# EAGLE board PCB v37 (EAGLE 9.7.0)
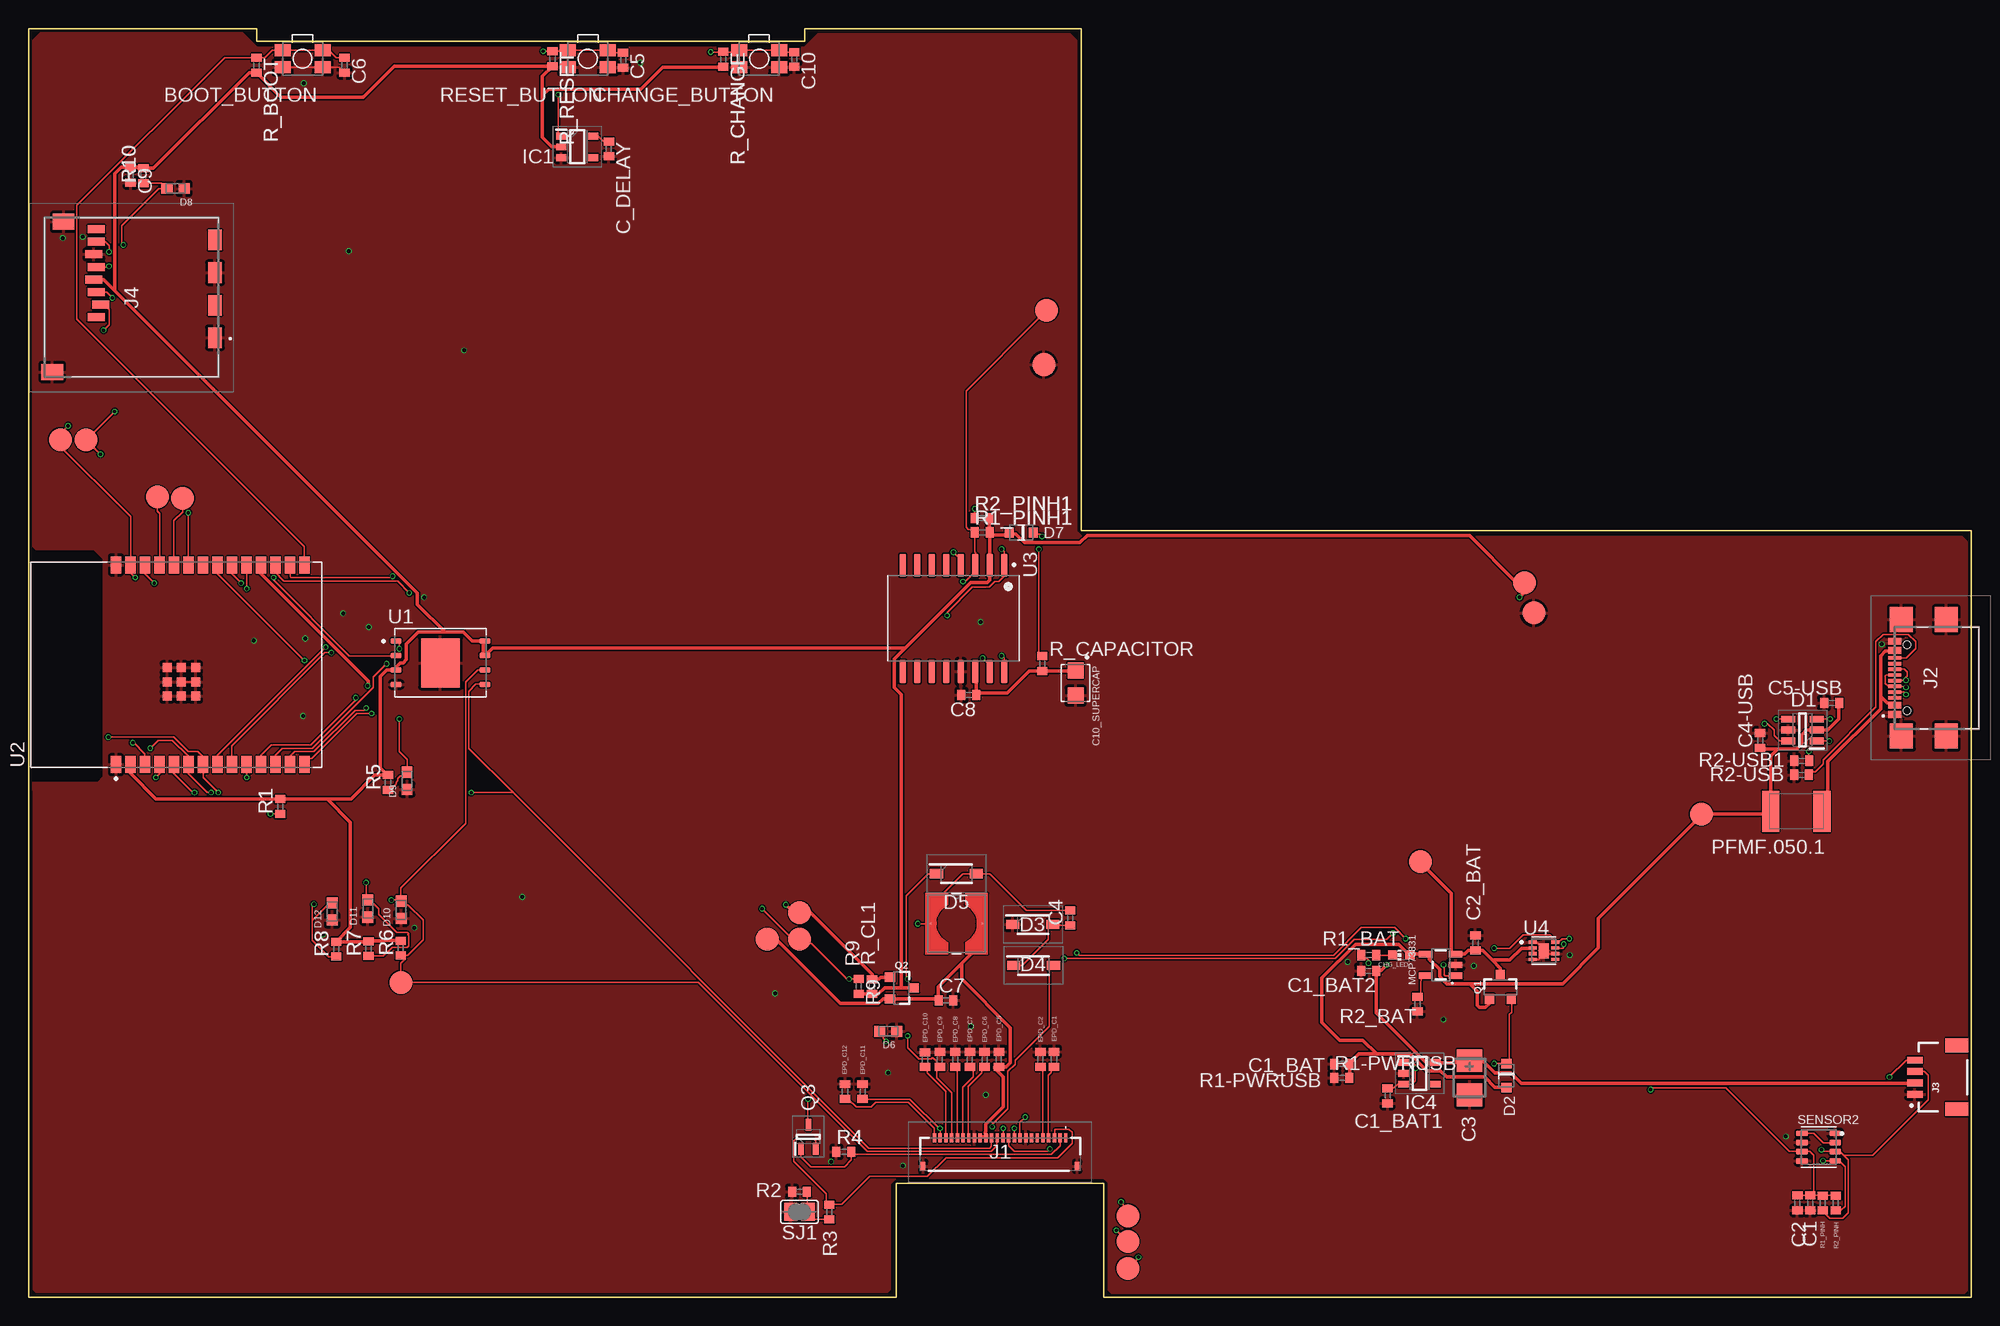
[diagram p0: board, top side]
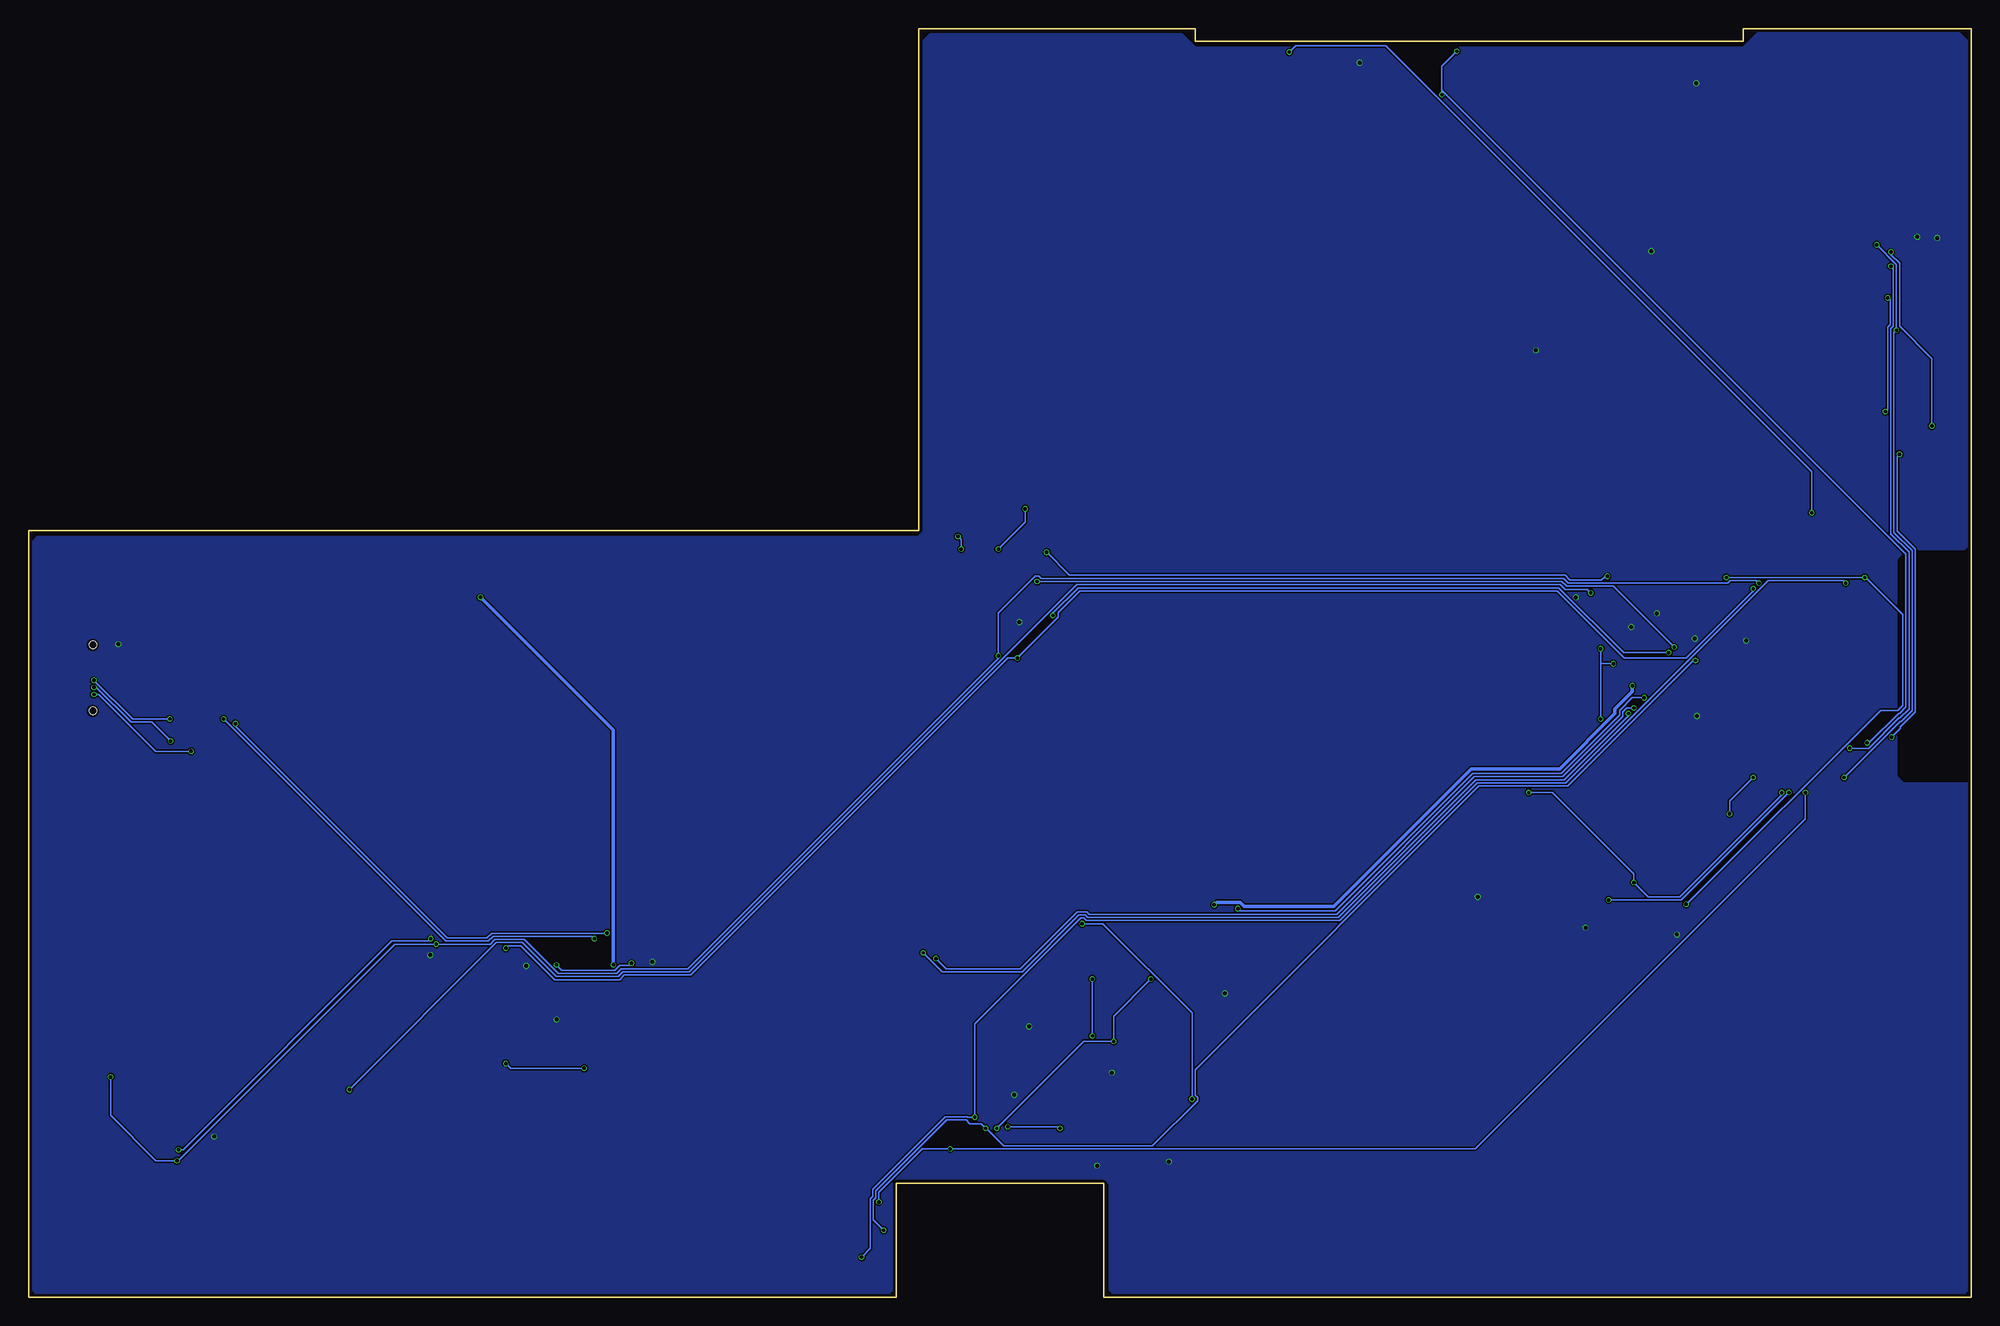
[diagram p1: board, bottom side, seen from below]

Size 170.2 x 111.2 mm. Coordinates in mm from the lower left corner, seen from the top.
Outline: 0,0 0,111.2 20,111.2 20,110.1 68,110.1 68,111.2 92.2,111.2 92.2,67.2 170.2,67.2 170.2,0 94.2,0 94.2,10 76,10 76,0 0,0
Copper layers (1*16): Top 0.035mm / dielectric 1.6mm / Bottom 0.035mm
Design rules "jlcpcb-2layers.dru *": minimum track width 0.15mm, minimum drill 0.3mm, track to track 5mil, track to pad 5mil, pad to pad 5mil, via to via 5mil, smd to smd 5mil, copper to edge 0.2mm, drill to drill 6mil, minimum pad ring 10mil, minimum via ring 3mil, stop-mask expansion 4mil, vias tented up to drill 0mil, thermal gap 10mil
Net classes: 1 Power lines: width 0.3 mm

## Footprints (pad centres in the part's own frame; a part is rotated, then mirrored left to right if it is on the bottom)
MYBUTTON = smd 1.4 x 1.05: 1 1.75,0.75; 2 -1.75,0.75; 3 -1.75,-0.75; 4 1.75,-0.75
EAGLE-LTSPICE_C0402 = smd 0.7 x 0.9: 1 -0.65,0; 2 0.65,0
ESP32_WROVER_EAGLE-LTSPICE_C0402 = smd 0.7 x 0.9: 1 -0.65,0; 2 0.65,0
RCL_CT3528 = smd 2 x 2.2: + -1.5,0; - 1.5,0
CAPCP3225X100N = smd 1.4 x 1.4: 1 -1.1,0; 2 1.1,0
ADAFRUIT_CHIP-LED0603 = smd 0.8 x 0.8: A 0,-0.75; C 0,0.75
SOT95P280X145-6N = smd 1.2 x 0.6: 1 -1.25,0.95; 2 -1.25,0; 3 -1.25,-0.95; 4 1.25,-0.95; 5 1.25,0; 6 1.25,0.95
ESP32_WROVER_AVX---SD0805S020S1R0_AVX_SD0805S020S1R0_0 = smd 0.8 x 0.9: 1 -1.05,0; 2 1.05,0
SOD3716X135N = smd 1.15 x 0.8: 1 -1.75,0; 2 1.75,0
DIOC1608X36N = smd 0.97 x 0.94: 1 -0.75,0; 2 0.75,0
SOT95P280X125-5N = smd 0.9 x 0.6: 1 -1.4,0.95; 2 -1.4,0; 3 -1.4,-0.95; 4 1.4,-0.95; 5 1.4,0.95
SOT95P280X120-5N = smd 0.9 x 0.6: 1 -1.4,0.95; 2 -1.4,0; 3 -1.4,-0.95; 4 1.4,-0.95; 5 1.4,0.95
FH34SRJ24S05SH99 = smd 0.3 x 0.8: 1 5.75,1.45; 2 5.25,1.45; 3 4.75,1.45; 4 4.25,1.45; 5 3.75,1.45; 6 3.25,1.45; 7 2.75,1.45; 8 2.25,1.45; 9 1.75,1.45; 10 1.25,1.45; 11 0.75,1.45; 12 0.25,1.45; 13 -0.25,1.45; 14 -0.75,1.45; 15 -1.25,1.45; 16 -1.75,1.45; 17 -2.25,1.45; 18 -2.75,1.45; 19 -3.25,1.45; 20 -3.75,1.45; 21 -4.25,1.45; 22 -4.75,1.45; 23 -5.25,1.45; 24 -5.75,1.45 | smd 0.4 x 0.8: MP1 6.75,-1.05; MP2 -6.75,-1.05
SAMACSYS_PARTS_USB4110GFA = smd 0.3 x 1.15: A1 -3.35,3.678; A4 -2.55,3.678; A5 -1.25,3.678; A6 -0.25,3.678; A7 0.25,3.678; A8 1.25,3.678; A9 2.55,3.678; A12 3.35,3.678; B1 3.05,3.678; B4 2.25,3.678; B5 1.75,3.678; B6 0.75,3.678; B7 -0.75,3.678; B8 -1.75,3.678; B9 -2.25,3.678; B12 -3.05,3.678 | smd 2.18 x 2: MP1 -5.11,-0.827; MP2 5.11,-0.827; MP3 -5.11,3.103; MP4 5.11,3.103 | hole 0.65: -2.89,2.603; 2.89,2.603
JST04_1MM_RA = smd 0.6 x 1.35: 1 -1.5,0; 2 -0.5,0; 3 0.5,0; 4 1.5,0 | smd 1.2 x 2: NC1 2.8,-3.675; NC2 -2.8,-3.675
112ATAARR03ATTEND = smd 1.8 x 1.2: G1 10.6,10.4; G2 4.9,10.4; S1 7.75,10.4; S2 2.05,10.4 | smd 1.4 x 1.9: G3 13.6,-3.85; G4 0.45,-2.85 | smd 0.7 x 1.5: P1 8.8,0; P2 7.7,0.4; P3 6.6,0; P4 5.5,-0.2; P5 4.4,0; P6 3.3,-0.2; P7 2.2,0; P8 1.1,0
IND_4828-WE-TPC_WRE = smd 0.127 x 0.127: 1 -2.286,0; 2 2.286,0
ESP32_WROVER_SPARKFUN-IC-POWER_SOT23-5 = smd 0.55 x 1.2: 1 -0.95,-1.3; 2 0,-1.3; 3 0.95,-1.3; 4 0.95,1.3; 5 -0.95,1.3
ESP32C6_VARISTOR_CT/CN1812 = smd 1.5 x 3.6: 1 -2.25,0; 2 2.25,0
ESP32_WROVER_SPARKFUN-DISCRETESEMI_SOT23-3 = smd 0.8 x 0.9: 1 -0.95,-1; 2 0.95,-1; 3 0,1.1
SOT65P210X110-3N = smd 1.05 x 0.5: 1 -1.05,0.65; 2 -1.05,-0.65; 3 1.05,0
ESP32_WROVER_EAGLE-LTSPICE_R0402 = smd 0.7 x 0.9: 1 -0.65,0; 2 0.65,0
ESP32_WROVER_BME680_PSON80P300X300X100-8N = smd 1.016 x 0.5: 1 1.458,1.2; 2 1.458,0.4; 3 1.458,-0.4; 4 1.458,-1.2; 5 -1.458,-1.22; 6 -1.458,-0.4; 7 -1.458,0.4; 8 -1.458,1.2
SJ = smd 1.168 x 1.6: 1 -0.762,0; 2 0.762,0
TP20R = smd 2 x 2: TP 0,0
SON127P600X800X80-9N = smd 0.94 x 0.44: 1 -3.895,1.905; 2 -3.895,0.635; 3 -3.895,-0.635; 4 -3.895,-1.905; 5 3.895,-1.905; 6 3.895,-0.635; 7 3.895,0.635; 8 3.895,1.905 | smd 3.4 x 4.3: 9 0,0
XCVR_ESP32-C6-WROOM-1-N8 = smd 1.5 x 0.9: 1 -8.75,5.26; 2 -8.75,3.99; 3 -8.75,2.72; 4 -8.75,1.45; 5 -8.75,0.18; 6 -8.75,-1.09; 7 -8.75,-2.36; 8 -8.75,-3.63; 9 -8.75,-4.9; 10 -8.75,-6.17; 11 -8.75,-7.44; 12 -8.75,-8.71; 13 -8.75,-9.98; 14 -8.75,-11.25; 15 8.75,-11.25; 16 8.75,-9.98; 17 8.75,-8.71; 18 8.75,-7.44; 19 8.75,-6.17; 20 8.75,-4.9; 21 8.75,-3.63; 22 8.75,-2.36; 23 8.75,-1.09; 24 8.75,0.18; 25 8.75,1.45; 26 8.75,2.72; 27 8.75,3.99; 28 8.75,5.26 | smd 0.8 x 0.8: 29_1 -2.755,0.79; 29_2 -1.505,0.79; 29_3 -0.255,0.79; 29_4 -2.755,-0.46; 29_5 -1.505,-0.46; 29_6 -0.255,-0.46; 29_7 -2.755,-1.71; 29_8 -1.505,-1.71; 29_9 -0.255,-1.71
SOIC127P1032X265-16N = smd 2.05 x 0.59: 1 -4.655,4.445; 2 -4.655,3.175; 3 -4.655,1.905; 4 -4.655,0.635; 5 -4.655,-0.635; 6 -4.655,-1.905; 7 -4.655,-3.175; 8 -4.655,-4.445; 9 4.655,-4.445; 10 4.655,-3.175; 11 4.655,-1.905; 12 4.655,-0.635; 13 4.655,0.635; 14 4.655,1.905; 15 4.655,3.175; 16 4.655,4.445
SON50P200X200X80-9N = smd 0.76 x 0.27: 1 -0.985,0.75; 2 -0.985,0.25; 3 -0.985,-0.25; 4 -0.985,-0.75; 5 0.985,-0.75; 6 0.985,-0.25; 7 0.985,0.25; 8 0.985,0.75 | smd 0.9 x 1.3: 9 0,0

## Placement (x,y rotation side)
BOOT_BUTTON  BUTTON_CUSYOMV1  [MYBUTTON]  24,108.55 180 top
C1  100nF  [EAGLE-LTSPICE_C0402]  156.07,8.29 270 top
C1_BAT  4.7uF  [EAGLE-LTSPICE_C0402]  115.04,20.46 180 top
C1_BAT1  4.7uF  [ESP32_WROVER_EAGLE-LTSPICE_C0402]  119.05,17.68 270 top
C1_BAT2  4.7uF  [ESP32_WROVER_EAGLE-LTSPICE_C0402]  117.39,28.63 180 top
C2  100nF  [EAGLE-LTSPICE_C0402]  154.95,8.29 270 top
C2_BAT  4.7uF  [EAGLE-LTSPICE_C0402]  126.75,31.06 90 top
C3  100uF TANT  [RCL_CT3528]  126.23,19.26 270 top
C4  4.7uF/25V  [EAGLE-LTSPICE_C0402]  91.26,33.25 90 top
C4-USB  100nF  [ESP32_WROVER_EAGLE-LTSPICE_C0402]  151.68,48.81 90 top
C5  1uF  [EAGLE-LTSPICE_C0402]  52.08,108.42 270 top
C5-USB  4.7uF  [ESP32_WROVER_EAGLE-LTSPICE_C0402]  157.95,52.09 180 top
C6  100nF  [EAGLE-LTSPICE_C0402]  27.68,107.99 270 top
C7  10uF  [EAGLE-LTSPICE_C0402]  80.37,26.04 0 top
C8  100nF  [EAGLE-LTSPICE_C0402]  82.36,52.79 180 top
C9  100nF  [EAGLE-LTSPICE_C0402]  8.94,98.34 270 top
C10  100nF  [EAGLE-LTSPICE_C0402]  67.07,108.49 270 top
C10_SUPERCAP  CPH3225A  [CAPCP3225X100N]  91.73,53.85 270 top
C_DELAY  100nF  [EAGLE-LTSPICE_C0402]  50.84,100.65 270 top
CHANGE_BUTTON  BUTTON_CUSYOMV1  [MYBUTTON]  64,108.55 180 top
CHG_LED  [ADAFRUIT_CHIP-LED0603]  120.26,30.01 90 top
D1  USBLC6-2SC6Y  [SOT95P280X145-6N]  155.4,49.73 180 top
D2  ESP32_WROVER_AVX---SD0805S020S1R0_AVX_SD0805S020S1R0_0_0AVX_SD0805S020S1R0_0_0  [ESP32_WROVER_AVX---SD0805S020S1R0_AVX_SD0805S020S1R0_0]  129.46,19.44 270 top
D3  MBR0530  [SOD3716X135N]  87.98,32.68 0 top
D4  MBR0530  [SOD3716X135N]  88.04,29.09 0 top
D5  MBR0530  [SOD3716X135N]  81.28,37.14 0 top
D6  PGB1010603MR  [DIOC1608X36N]  75.3,23.33 180 top
D7  ESP32_WROVER_AVX---SD0805S020S1R0_AVX_SD0805S020S1R0_0_0AVX_SD0805S020S1R0_0_0  [ESP32_WROVER_AVX---SD0805S020S1R0_AVX_SD0805S020S1R0_0]  86.96,67.04 180 top
D8  PGB1010603MR  [DIOC1608X36N]  12.88,97.18 180 top
D9  PGB1010603MR  [DIOC1608X36N]  33.16,45.28 90 top
D10  PGB1010603MR  [DIOC1608X36N]  32.64,33.98 90 top
D11  PGB1010603MR  [DIOC1608X36N]  29.72,34.08 90 top
D12  PGB1010603MR  [DIOC1608X36N]  26.6,33.83 90 top
EPD_C1  1uF/50V  [EAGLE-LTSPICE_C0402]  89.83,20.88 90 top
EPD_C2  1uF/50V  [EAGLE-LTSPICE_C0402]  88.64,20.88 90 top
EPD_C5  1uF/50V  [EAGLE-LTSPICE_C0402]  85,20.88 90 top
EPD_C6  1uF/50V  [EAGLE-LTSPICE_C0402]  83.75,20.86 90 top
EPD_C7  1uF/50V  [EAGLE-LTSPICE_C0402]  82.46,20.86 90 top
EPD_C8  1uF/50V  [EAGLE-LTSPICE_C0402]  81.17,20.86 90 top
EPD_C9  1uF/50V  [EAGLE-LTSPICE_C0402]  79.83,20.86 90 top
EPD_C10  1uF/50V  [EAGLE-LTSPICE_C0402]  78.53,20.85 90 top
EPD_C11  1uF/50V  [EAGLE-LTSPICE_C0402]  73.06,18.05 90 top
EPD_C12  1uF/50V  [EAGLE-LTSPICE_C0402]  71.52,18.05 90 top
IC1  BD5229G-TR  [SOT95P280X125-5N]  48.07,100.83 0 top
IC4  XC6220A331MR-G  [SOT95P280X120-5N]  121.85,19.65 0 top
J1  FH34SRJ-24S-0.5SH_99_  [FH34SRJ24S05SH99]  85.11,12.55 0 top
J2  SAMACSYS_PARTS_USB4110-GF-A  [SAMACSYS_PARTS_USB4110GFA]  167.16,54.3 90 top
J3  QWIIC_RIGHT_ANGLE  [JST04_1MM_RA]  165.25,19.3 90 top
J4  112A-TAAR-R03_ATTEND  [112ATAARR03ATTEND]  5.93,94.71 270 top
L1  68uH  [IND_4828-WE-TPC_WRE]  81.29,32.76 0 top
MCP73831  ESP32_WROVER_SPARKFUN-IC-POWER_MCP73831  [ESP32_WROVER_SPARKFUN-IC-POWER_SOT23-5]  123.7,29.15 90 top
PFMF.050.1  ESP32C6_VARISTORCN1812  [ESP32C6_VARISTOR_CT/CN1812]  154.86,42.61 180 top
Q1  20V/4.2A/52mΩ/1.4W  [ESP32_WROVER_SPARKFUN-DISCRETESEMI_SOT23-3]  128.93,27.17 0 top
Q2  20V/4.2A/52mΩ/1.4W  [ESP32_WROVER_SPARKFUN-DISCRETESEMI_SOT23-3]  76.45,27.12 270 top
Q3  SI1308EDL-T1-GE3  [SOT65P210X110-3N]  68.31,14.09 90 top
R1  10k  [ESP32_WROVER_EAGLE-LTSPICE_R0402]  22.05,43.02 90 top
R1-PWRUSB  100k  [ESP32_WROVER_EAGLE-LTSPICE_R0402]  115.04,19.25 0 top
R1_BAT  200  [ESP32_WROVER_EAGLE-LTSPICE_R0402]  117.41,30.01 180 top
R1_PINH  10k  [ESP32_WROVER_EAGLE-LTSPICE_R0402]  157.18,8.28 270 top
R1_PINH1  10k  [ESP32_WROVER_EAGLE-LTSPICE_R0402]  83.53,67.05 0 top
R2  2.2  [ESP32_WROVER_EAGLE-LTSPICE_R0402]  67.54,9.27 0 top
R2-USB  5k1  [ESP32_WROVER_EAGLE-LTSPICE_R0402]  155.31,45.8 180 top
R2-USB1  5k1  [ESP32_WROVER_EAGLE-LTSPICE_R0402]  155.32,47.03 0 top
R2_BAT  2k  [ESP32_WROVER_EAGLE-LTSPICE_R0402]  121.67,25.71 90 top
R2_PINH  10k  [ESP32_WROVER_EAGLE-LTSPICE_R0402]  158.31,8.28 270 top
R2_PINH1  10k  [ESP32_WROVER_EAGLE-LTSPICE_R0402]  83.52,68.3 0 top
R3  0.47  [ESP32_WROVER_EAGLE-LTSPICE_R0402]  70.14,7.49 90 top
R4  10k  [ESP32_WROVER_EAGLE-LTSPICE_R0402]  71.42,12.77 0 top
R5  10k  [ESP32_WROVER_EAGLE-LTSPICE_R0402]  31.49,45.12 90 top
R6  10k  [ESP32_WROVER_EAGLE-LTSPICE_R0402]  32.61,30.62 90 top
R7  10k  [ESP32_WROVER_EAGLE-LTSPICE_R0402]  29.78,30.57 90 top
R8  10k  [ESP32_WROVER_EAGLE-LTSPICE_R0402]  26.95,30.52 90 top
R9  10k  [ESP32_WROVER_EAGLE-LTSPICE_R0402]  72.72,27.27 270 top
R10  10k  [ESP32_WROVER_EAGLE-LTSPICE_R0402]  10.06,98.32 90 top
R_BOOT  10k  [ESP32_WROVER_EAGLE-LTSPICE_R0402]  19.97,107.98 270 top
R_CAPACITOR  15  [ESP32_WROVER_EAGLE-LTSPICE_R0402]  88.79,55.55 270 top
R_CHANGE  10k  [ESP32_WROVER_EAGLE-LTSPICE_R0402]  60.86,108.5 270 top
R_CL1  10k  [ESP32_WROVER_EAGLE-LTSPICE_R0402]  73.89,27.24 270 top
R_RESET  10k  [ESP32_WROVER_EAGLE-LTSPICE_R0402]  45.9,108.55 270 top
RESET_BUTTON  BUTTON_CUSYOMV1  [MYBUTTON]  49,108.55 180 top
SENSOR2  ESP32_WROVER_BME680_BME680  [ESP32_WROVER_BME680_PSON80P300X300X100-8N]  156.81,13.18 0 top
SJ1  [SJ]  67.53,7.5 0 top
TP1  TPTP20R  [TP20R]  11.28,70.15 0 top
TP2  TPTP20R  [TP20R]  13.5,70.05 0 top
TP3  TPTP20R  [TP20R]  121.93,38.2 0 top
TP4  TPTP20R  [TP20R]  88.94,81.75 0 top
TP5  TPTP20R  [TP20R]  131.86,60 0 top
TP6  TPTP20R  [TP20R]  2.78,75.17 0 top
TP7  TPTP20R  [TP20R]  5.05,75.15 0 top
TP8  TPTP20R  [TP20R]  32.62,27.6 0 top
TP9  TPTP20R  [TP20R]  96.3,2.54 0 top
TP10  TPTP20R  [TP20R]  67.54,31.42 0 top
TP11  TPTP20R  [TP20R]  96.31,7.15 0 top
TP12  TPTP20R  [TP20R]  96.29,4.92 0 top
TP13  TPTP20R  [TP20R]  67.54,33.72 0 top
TP14  TPTP20R  [TP20R]  146.54,42.37 0 top
TP15  TPTP20R  [TP20R]  89.19,86.52 0 top
TP16  TPTP20R  [TP20R]  131.06,62.65 0 top
TP17  TPTP20R  [TP20R]  64.71,31.4 0 top
U1  W25Q512JVEIQ  [SON127P600X800X80-9N]  36.09,55.61 0 top
U2  ESP32-C6-WROOM-1-N8  [XCVR_ESP32-C6-WROOM-1-N8]  12.93,55.45 90 top
U3  DS3231SN#  [SOIC127P1032X265-16N]  81.02,59.51 270 top
U4  MAX17048G+T10  [SON50P200X200X80-9N]  132.74,30.38 0 top

## Library data of the parts
BOOT_BUTTON CHANGE_BUTTON CHG_LED PFMF.050.1 RESET_BUTTON SJ1 TP1-TP17 = DeskAssistant v19 v1
C1 C1_BAT C1_BAT1 C1_BAT2 C2 C2_BAT C4 C4-USB C5 C5-USB C6-C10 C_DELAY EPD_C1 EPD_C2 EPD_C5-EPD_C12 = DeskAssistant v19 v1; SPICEMODEL: NONE; SPICEPREFIX: C
C3 = DeskAssistant v19 v1; SPICEPREFIX: C
C10_SUPERCAP = DeskAssistant v19 v1; AVAILABILITY: Not in stock; CHECK_PRICES: https://www.snapeda.com/parts/CPH3225A/Seiko+Instruments/view-part/?ref=eda; DESCRIPTION: 11 mF (EDLC) Supercapacitor 3.3 V 1210 (3225 Metric) - -; MF: Seiko Instruments; MP: CPH3225A; PACKAGE: 1210 Seiko; PRICE: None; PURCHASE-URL: https://www.snapeda.com/api/url_track_click_mouser/?unipart_id=562593&manufacturer=Seiko Instruments&part_name=CPH3225A&search_term=None; SNAPEDA_LINK: https://www.snapeda.com/parts/CPH3225A/Seiko+Instruments/view-part/?ref=snap
D1 = DeskAssistant v19 v1; AVAILABILITY: In Stock; CHECK_PRICES: https://www.snapeda.com/parts/USBLC6-2SC6Y/STMicroelectronics/view-part/?ref=eda; DESCRIPTION: 17V Clamp 5A (8/20µs) Ipp Tvs Diode Surface Mount SOT-23-6; MF: STMicroelectronics; MP: USBLC6-2SC6Y; PACKAGE: SOT-23-6 STMicroelectronics; PRICE: None; SNAPEDA_LINK: https://www.snapeda.com/parts/USBLC6-2SC6Y/STMicroelectronics/view-part/?ref=snap
D2 D7 = DeskAssistant v19 v1; CENTROID_NOT_SPECIFIED: No; DATASHEET: http://datasheets.avx.com/schottky.pdf; DIGIKEY_DESCRIPTION: DIODE SCHOTTKY 20V 1A 0805; DIGIKEY_PART_NUMBER: 478-7800-1-ND; LEAD_FREE: yes; MF: AVX; MOUSER_PART_NUMBER: 581-SD0805S020S1R0; PACKAGE: 0805 (2012 metric); PREFIX: D; ROHS: yes; TEMPERATURE_RANGE_HIGH: +125°C; TEMPERATURE_RANGE_LOW: -55°C
D3-D5 = DeskAssistant v19 v1; AVAILABILITY: In Stock; CHECK_PRICES: https://www.snapeda.com/parts/MBR0530/Onsemi/view-part/?ref=eda; DESCRIPTION: Diode Schottky 30 V 500mA Surface Mount SOD-123; MF: ON Semiconductor; MP: MBR0530; PACKAGE: SOD-123-2 ON Semiconductor; PRICE: None; PURCHASE-URL: https://www.snapeda.com/api/url_track_click_mouser/?unipart_id=179458&manufacturer=ON Semiconductor&part_name=MBR0530&search_term=None; SNAPEDA_LINK: https://www.snapeda.com/parts/MBR0530/Onsemi/view-part/?ref=snap
D6 D8-D12 = DeskAssistant v19 v1; AVAILABILITY: In Stock; CHECK_PRICES: https://www.snapeda.com/parts/PGB1010603MR/Littelfuse/view-part/?ref=eda; DESCRIPTION: 150V (Typ) Clamp - Ipp Tvs Diode Surface Mount 0603 (1608 Metric); MF: Littelfuse Inc.; MP: PGB1010603MR; PACKAGE: 0603 Littelfuse Inc.; PRICE: None; PURCHASE-URL: https://www.snapeda.com/api/url_track_click_mouser/?unipart_id=5659453&manufacturer=Littelfuse Inc.&part_name=PGB1010603MR&search_term=None; SNAPEDA_LINK: https://www.snapeda.com/parts/PGB1010603MR/Littelfuse/view-part/?ref=snap
IC1 = DeskAssistant v19 v1; DESCRIPTION: Voltage Detector with Adjustable Delay Time: CMOS processes are utilized to develop high precision, low current consumption CMOS reset ICs that allow arbitrary setting of the delay time. The extensive lineup includes both Nch Open Drain and CMOS output types in a wide range of detection voltages (from 2.3V to 6.0V, in 0.1V steps), enabling selection of the ideal solution based on customer requirements. In addition, the entire series is of course both lead-free and RoHS-compliant.; HEIGHT: 1.25mm; MANUFACTURER_NAME: ROHM Semiconductor; MANUFACTURER_PART_NUMBER: BD5229G-TR; MOUSER_PART_NUMBER: 755-BD5229G-TR; MOUSER_PRICE-STOCK: https://www.mouser.co.uk/ProductDetail/ROHM-Semiconductor/BD5229G-TR?qs=4kLU8WoGk0vvnhrrYwdszw%3D%3D
IC4 = DeskAssistant v19 v1; DESCRIPTION: LDO Voltage Regulators; HEIGHT: 1.2mm; MANUFACTURER_NAME: Torex; MANUFACTURER_PART_NUMBER: XC6220A331MR-G; MOUSER_PART_NUMBER: 865-XC6220A331MR-G; MOUSER_PRICE-STOCK: https://www.mouser.co.uk/ProductDetail/Torex-Semiconductor/XC6220A331MR-G?qs=AsjdqWjXhJ8ZSWznL1J0gg%3D%3D
J1 = DeskAssistant v19 v1; DESCRIPTION: 24 Position FFC, FPC Connector Contacts, Top and Bottom 0.020" (0.50mm) Surface Mount, Right Angle; HEIGHT: 1.1mm; MANUFACTURER_NAME: Hirose; MANUFACTURER_PART_NUMBER: FH34SRJ-24S-0.5SH(99); MOUSER_PART_NUMBER: 798-FH34SRJ24S05SH99; MOUSER_PRICE-STOCK: https://www.mouser.co.uk/ProductDetail/Hirose-Connector/FH34SRJ-24S-0.5SH99?qs=vcbW%252B4%252BSTIpKBl5ap9J8Fw%3D%3D
J2 = DeskAssistant v19 v1; DESCRIPTION: CONN USB 2.0 TYPE-C R/A SMT; HEIGHT: 3.26mm; MANUFACTURER_NAME: GCT (GLOBAL CONNECTOR TECHNOLOGY); MANUFACTURER_PART_NUMBER: USB4110-GF-A; MOUSER_PART_NUMBER: 640-USB4110-GF-A; MOUSER_PRICE-STOCK: https://www.mouser.co.uk/ProductDetail/GCT/USB4110-GF-A?qs=KUoIvG%2F9IlYiZvIXQjyJeA%3D%3D
J3 = DeskAssistant v19 v1; PROD_ID: CONN-13694
J4 = DeskAssistant v19 v1; DESCRIPTION: Micro SD Card Socket, Push-Push Type, Top Mount, SMT, H=1.83mm, 10u; HEIGHT: 1.9mm; MANUFACTURER_NAME: ATTEND; MANUFACTURER_PART_NUMBER: 112A-TAAR-R03 ATTEND
L1 = DeskAssistant v19 v1; COPYRIGHT: Copyright (C) 2024 Ultra Librarian. All rights reserved.; MANUFACTURER_PART_NUMBER: 744043680; MFR_NAME: Wurth Electronics
MCP73831 = DeskAssistant v19 v1; PROD_ID: IC-09995
Q1 Q2 = DeskAssistant v19 v1; PROD_ID: TRAN-14388
Q3 = DeskAssistant v19 v1; AVAILABILITY: In Stock; CHECK_PRICES: https://www.snapeda.com/parts/SI1308EDL-T1-GE3/Vishay+Siliconix/view-part/?ref=eda; DESCRIPTION: Si1308EDL-T1-GE3 N-channel MOSFET Transistor, 1.5 A, 30 V, 3-Pin SC-70 | Siliconix / Vishay SI1308EDL-T1-GE3; MF: Vishay Siliconix; MP: SI1308EDL-T1-GE3; PACKAGE: SOT-323 Vishay Semiconductor; PRICE: None; PURCHASE-URL: https://www.snapeda.com/api/url_track_click_mouser/?unipart_id=274603&manufacturer=Vishay Siliconix&part_name=SI1308EDL-T1-GE3&search_term=None; SNAPEDA_LINK: https://www.snapeda.com/parts/SI1308EDL-T1-GE3/Vishay+Siliconix/view-part/?ref=snap
R1 R1-PWRUSB R1_BAT R1_PINH R1_PINH1 R2 R2-USB R2-USB1 R2_BAT R2_PINH R2_PINH1 R3-R10 R_BOOT R_CAPACITOR R_CHANGE R_CL1 R_RESET = DeskAssistant v19 v1; SPICEMODEL: NONE; SPICEPREFIX: R
SENSOR2 = DeskAssistant v19 v1; AVAILABILITY: Unavailable; DESCRIPTION: Integrated Environmental Unit; MF: Bosch Sensortec; MP: BME680; PACKAGE: LGA-8 Bosch Tools; PRICE: None
U1 = DeskAssistant v19 v1; AVAILABILITY: In Stock; CHECK_PRICES: https://www.snapeda.com/parts/W25Q512JVEIQ/Winbond+Electronics/view-part/?ref=eda; DESCRIPTION: FLASH - NOR Memory IC 512Mb (64M x 8) SPI - Quad I/O 133 MHz 8-WSON (8x6); MF: Winbond Electronics; MP: W25Q512JVEIQ; PACKAGE: Package; PRICE: None; SNAPEDA_LINK: https://www.snapeda.com/parts/W25Q512JVEIQ/Winbond+Electronics/view-part/?ref=snap
U2 = DeskAssistant v19 v1; AVAILABILITY: In Stock; CHECK_PRICES: https://www.snapeda.com/parts/ESP32-C6-WROOM-1-N8/Espressif+Systems/view-part/?ref=eda; DESCRIPTION: Multiprotocol Modules ESP32-C6 module, Wi-Fi 6 in 2.4 GHz band, Bluetooth 5, Zigbee 3.0 and Thread. ESP34-WROOM Compatible - ENGINEERING SAMPLE; MF: Espressif Systems; MP: ESP32-C6-WROOM-1-N8; PACKAGE: None; PRICE: None; SNAPEDA_LINK: https://www.snapeda.com/parts/ESP32-C6-WROOM-1-N8/Espressif+Systems/view-part/?ref=snap
U3 = DeskAssistant v19 v1; AVAILABILITY: In Stock; CHECK_PRICES: https://www.snapeda.com/parts/DS3231SN%23/Analog+Devices/view-part/?ref=eda; DESCRIPTION: Extremely Accurate I²C-Integrated RTC/TCXO/Crystal; MF: Analog Devices; MP: DS3231SN#; PACKAGE: SOIC-16 Maxim; PRICE: None; PURCHASE-URL: https://www.snapeda.com/api/url_track_click_mouser/?unipart_id=99048&manufacturer=Analog Devices&part_name=DS3231SN#&search_term=None; SNAPEDA_LINK: https://www.snapeda.com/parts/DS3231SN%23/Analog+Devices/view-part/?ref=snap
U4 = DeskAssistant v19 v1; AVAILABILITY: In Stock; CHECK_PRICES: https://www.snapeda.com/parts/MAX17048G+T10/Analog+Devices/view-part/?ref=eda; DESCRIPTION: 3µA 1-Cell/2-Cell Fuel Gauge with ModelGauge; MF: Analog Devices; MP: MAX17048G+T10; PACKAGE: TDFN-8 Maxim; PRICE: None; PURCHASE-URL: https://www.snapeda.com/api/url_track_click_mouser/?unipart_id=329239&manufacturer=Analog Devices&part_name=MAX17048G+T10&search_term=None; SNAPEDA_LINK: https://www.snapeda.com/parts/MAX17048G+T10/Analog+Devices/view-part/?ref=snap

## Nets
3V3 [Power lines]: C1_BAT2.1 C3.+ C9.1 D7.2 IC1.2 IC4.5 J3.2 J4.P4 Q2.3 R1.2 R1_PINH1.2 R2_PINH1.2 R5.2 R6.2 R7.2 R8.2 R9.2 R10.2 R_BOOT.2 R_CHANGE.2 R_CL1.2 R_RESET.2 TP16.TP U1.3 U1.7 U1.8 U2.2 U3.2
32KHZ: R2_PINH1.1 U2.9 U3.1
DN: D1.1 J2.A7 J2.B7
DP: D1.3 J2.A6 J2.B6
EPD_3V3 [Power lines]: C7.1 EPD_C5.1 J1.15 J1.16 L1.2 Q2.2 TP17.TP
EPD_3V3_C [Power lines]: Q2.1 R_CL1.1 TP13.TP U2.18
EPD_BUSY: J1.9 TP9.TP U2.26
EPD_CS: D6.2 J1.12 R9.1 TP10.TP U2.11
EPD_DC: J1.11 TP11.TP U2.5
EPD_RST: J1.10 TP12.TP U2.21
FLASH_CS: D9.2 R5.1 U1.1 U2.12
GDR: J1.2 Q3.1 R4.2
GND: BOOT_BUTTON.1 BOOT_BUTTON.2 C1.2 C1_BAT1.2 C1_BAT2.2 C1_BAT.2 C2.2 C2_BAT.2 C3.- C4-USB.2 C5-USB.2 C5.2 C6.2 C7.2 C8.2 C9.2 C10.2 C10_SUPERCAP.2 C_DELAY.2 CHANGE_BUTTON.1 CHANGE_BUTTON.2 D1.5 D3.1 D6.1 D8.1 D9.1 D10.1 D11.1 D12.1 EPD_C1.2 EPD_C2.2 EPD_C5.2 EPD_C6.2 EPD_C7.2 EPD_C8.2 EPD_C9.2 EPD_C10.2 EPD_C11.2 EPD_C12.2 IC1.3 IC4.2 J1.8 J1.17 J1.MP1 J1.MP2 J2.A1 J2.A12 J2.B1 J2.B12 J2.MP1 J2.MP2 J2.MP3 J2.MP4 J3.1 J4.G1 J4.G2 J4.G3 J4.G4 J4.P6 MCP73831.2 R1-PWRUSB.1 R2-USB1.1 R2-USB.2 R2.1 R2_BAT.1 R4.1 RESET_BUTTON.1 RESET_BUTTON.2 SENSOR2.1 SENSOR2.5 SENSOR2.7 SJ1.1 TP4.TP TP5.TP U1.4 U1.9 U2.1 U2.28 U2.29_1 U2.29_2 U2.29_3 U2.29_4 U2.29_5 U2.29_6 U2.29_7 U2.29_8 U2.29_9 U3.13 U4.1 U4.4 U4.6 U4.9
GPIO8: R1.1 U2.10
I2C_PW: C1.1 C2.1 R1_PINH.1 R2_PINH.1 SENSOR2.6 U2.17
INT_RTC: R1_PINH1.1 TP15.TP U2.8 U3.3
IO/BOOT: BOOT_BUTTON.3 BOOT_BUTTON.4 C6.1 R_BOOT.1 U2.15
IO/CHANGE: C10.1 CHANGE_BUTTON.3 CHANGE_BUTTON.4 R_CHANGE.1 U2.23
MISO: D12.2 J4.P7 R8.1 TP6.TP U1.2 U2.27
MOSI: D11.2 J1.14 J4.P3 R7.1 TP7.TP U1.5 U2.7
N$1: J2.A5 R2-USB1.2
N$2: J2.B5 R2-USB.1
N$3: SENSOR2.2 SENSOR2.8
N$4: EPD_C6.1 J1.18
N$5: C1_BAT1.1 D2.1 IC4.1 IC4.3 Q1.2
N$6: EPD_C7.1 J1.19
N$7: EPD_C8.1 J1.20
N$8: C4.1 D3.2 D4.1
N$10: EPD_C10.1 J1.22
N$12: EPD_C12.1 J1.24
N$14: C_DELAY.1 IC1.5
N$16: MCP73831.1 R1_BAT.2
N$17: CHG_LED.C R1_BAT.1
N$18: MCP73831.5 R2_BAT.2
N$21: D7.1 R_CAPACITOR.1
N$22: EPD_C1.1 J1.4
N$23: EPD_C2.1 J1.5
PREVGH: D5.1 EPD_C9.1 J1.21
PREVGL: D4.2 EPD_C11.1 J1.23
RESE: J1.3 Q3.2 R3.2
RESE': R2.2 R3.1 SJ1.2
RESET: C5.1 IC1.1 R_RESET.1 RESET_BUTTON.3 RESET_BUTTON.4 U2.3
RTC_RST: U2.16 U3.4
RX: TP2.TP U2.24
SCK: D10.2 J1.13 J4.P5 R6.1 TP8.TP U1.6 U2.6
SCL: J3.4 R2_PINH.2 SENSOR2.4 U2.20 U3.16 U4.7
SDA: J3.3 R1_PINH.2 SENSOR2.3 U2.19 U3.15 U4.8
SRC: C4.2 D5.2 L1.1 Q3.3
SS_SD: D8.2 J4.P2 R10.1 U2.4
TX: TP1.TP U2.25
USB_D+: D1.4 U2.14
USB_D-: D1.6 U2.13
VBAT [Power lines]: C2_BAT.1 MCP73831.3 Q1.3 TP3.TP U4.2 U4.3
VBUS [Power lines]: C1_BAT.1 C4-USB.1 C5-USB.1 CHG_LED.A D1.2 D2.2 MCP73831.4 PFMF.050.1.2 Q1.1 R1-PWRUSB.2 TP14.TP
VRTC [Power lines]: C8.1 C10_SUPERCAP.1 R_CAPACITOR.2 U3.14
VUSB [Power lines]: J2.A4 J2.A9 J2.B4 J2.B9 PFMF.050.1.1

## Tracks (layer width: path | path; a pad name or v marks a point on that pad's centre or on a via)
3V3  (via drill 0.3)
  Top 0.3: 45.64,107.89 45.84,107.89 R_RESET.2 | 45.01,105.35 45.01,101.67 45.84,100.83 IC1.2 | R_CHANGE.2 60.8,107.82 55.54,107.82 53.62,105.9 45.55,105.9 45.01,105.35 | 7.56,88.24 7.56,98.48 8.1,99.03 8.86,99.03 C9.1 9,99.03 9.56,99.03 9.63,98.96 10.04,98.96 R10.2 10.18,98.96 10.94,98.96 19.32,107.34 19.94,107.34 R_BOOT.2 22.11,105.19 29.31,105.19 32.02,107.89 45.5,107.89 R_RESET.2 | J4.P4 5.75,89.19 6.61,89.19 7.56,88.24 | 27.01,31.16 R8.2 | 29.78,31.23 R7.2 | R6.2 32.55,31.3 30.95,31.3 30.89,31.23 29.92,31.23 R7.2 | 26.15,43.7 28.25,43.7 30.32,45.77 R5.2 31.44,45.77 30.81,46.41 30.81,54.42 31.37,54.98 32.13,54.98 U1.3 32.06,55.12 32.55,55.61 32.83,55.61 33.1,55.88 33.1,57.27 34.14,58.31 36.5,58.31 | 26.15,43.7 22.09,43.7 R1.2 21.95,43.7 11.15,43.7 8.93,45.91 8.93,46.67 U2.2 | J3.2 165.23,18.77 130.74,18.77 129.84,19.67 128.46,19.67 127.35,20.77 126.38,20.77 C3.+ 126.17,20.77 125.14,20.77 124.93,20.57 123.27,20.57 IC4.5 123.13,20.57 122.43,20.57 118.07,24.93 118.07,28.6 C1_BAT2.1 118.21,28.67 118.49,28.67 v118.97,29.15 | R9.2 72.78,26.59 R_CL1.2 74.03,26.59 74.44,26.59 75,27.15 76.45,27.15 | 76.45,27.15 77.49,27.15 Q2.3 | R2_PINH1.2 84.14,68.28 84.14,67.59 84.21,67.52 84.21,67.1 R1_PINH1.2 | R1_PINH1.2 84.21,66.97 84.21,66.83 85.52,66.83 85.59,66.76 85.94,66.76 85.94,67.03 D7.2 86.08,66.89 86.49,66.89 87.25,66.13 92.1,66.13 92.73,66.76 126.24,66.76 130.33,62.67 131.02,62.67 TP16.TP 131.02,62.53 131.02,61.77 v130.61,61.35 | R1_PINH1.2 84.21,66.69 84.21,64.19 U3.2 84.21,64.06 84.21,62.88 84,62.67 82.55,62.67 76.74,56.87 | 76.45,27.15 76.45,52.84 75.83,53.46 75.83,55.95 76.74,56.87
  Top 0.3: 76.74,56.87 76.68,56.93 40.66,56.93 U1.7 39.96,56.23 39.68,56.23 39.68,56.37 39.82,56.51 39.82,57.55 39.96,57.55 U1.8 39.68,57.55 38.85,57.55 38.09,58.31 36.5,58.31 | 7.56,88.24 34.07,61.73 34.07,60.74 36.5,58.31 | R7.2 29.73,31.16 27.01,31.16 | 27.01,31.16 R8.2 28.2,32.41 28.2,41.65 26.15,43.7 | 45.01,105.35 45.01,107 R_RESET.2
  Bottom 0.3: v118.97,29.15 118.97,49.72 v130.61,61.35
32KHZ  (via drill 0.3)
  Top 0.15: v82.89,69.11 82.89,68.35 R2_PINH1.1 | v85.25,65.58 85.45,65.37 85.45,64.19 U3.1 85.45,64.13 85.45,63.23 84.97,62.74 84.62,62.74 84.14,62.26 82.68,62.26 80.47,60.04 v80.47,59.76 | v26.52,56.51 25.97,56.51 17.8,48.34 17.8,46.74 U2.9
  Bottom 0.15: v82.89,69.11 82.89,67.93 v85.25,65.58 | v26.52,56.51 30.47,56.51 36.15,62.19 78.25,62.19 80.47,59.97 v80.47,59.76
DN  (via drill 0.3)
  Top 0.15: J2.A7 163.43,54.57 162.74,54.57 162.67,54.5 162.67,53.81 162.94,53.53 163.43,53.53 J2.B7 163.5,53.53 164.4,53.53 v164.47,53.46 | v157.75,48.75 156.71,48.75 D1.1
  Bottom 0.15: v157.75,48.75 159.41,50.41 161.21,50.41 164.26,53.46 v164.47,53.46
DP  (via drill 0.3)
  Top 0.15: v164.47,54.08 164.18,54.08 | 164.18,54.08 163.5,54.08 J2.A6 | 164.18,54.08 164.57,54.47 164.57,54.81 164.33,55.05 163.5,55.05 J2.B6 | v157.82,50.69 156.71,50.69 D1.3
  Bottom 0.15: v157.82,50.69 161.08,50.69 v164.47,54.08
EPD_3V3
  Top 0.3: J1.16 83.38,14.06 83.79,14.06 83.86,14.13 83.93,14.06 J1.15 83.93,14.27 83.79,14.4 83.79,14.47 83.86,14.54 83.86,15.17 85.39,16.69 85.39,19.32 84.62,20.08 84.62,20.22 84.97,20.22 EPD_C5.1 85.11,20.22 85.66,20.22 86.01,20.57 86.01,23.64 81.75,27.9 81.75,29.25 | TP17.TP 64.75,31.37 65.51,31.37 71.12,25.76 74.44,25.76 74.86,26.18 75.34,26.18 Q2.2 75.48,26.18 79.71,26.18 79.71,26.04 C7.1 79.71,26.32 79.71,27.21 81.75,29.25 | 81.75,29.25 83.24,30.75 83.24,32.76 83.52,32.76 L1.2
EPD_3V3_C  (via drill 0.3)
  Top 0.3: Q2.1 75.41,28.05 74.65,28.05 74.51,27.91 73.96,27.91 R_CL1.1 73.89,28.05 73.89,28.32 68.49,33.73 67.59,33.73 TP13.TP 67.45,33.73 66.83,33.73 66.76,33.79 66.76,34 v66.34,34.42 | v29.71,53.6 29.78,53.67 29.78,54.02 20.36,63.43 U2.18
  Bottom 0.3: v29.71,53.6 29.71,53.12 31.23,51.59 31.23,51.18 36.08,46.33 43.84,46.33 55.88,34.28 63.71,34.28 64.06,34.62 66.13,34.62 v66.34,34.42
EPD_BUSY  (via drill 0.3)
  Top 0.15: v87.31,15.8 86.84,15.33 86.84,14.06 J1.9 | v97.23,3.53 97.23,3.46 96.95,3.19 96.95,2.56 96.33,2.56 TP9.TP | v11.01,62.6 10.18,63.43 10.18,64.19 U2.26
  Bottom 0.15: v97.23,3.53 96.47,4.29 96.47,8.66 96.26,8.86 96.26,9.49 89.92,15.83 87.95,15.83 87.92,15.8 v87.31,15.8 87.31,23.97 78.05,33.24 77.77,33.24 77.56,33.03 55.33,33.03 43.28,45.08 35.52,45.08 17.8,62.81 11.22,62.81 v11.01,62.6
EPD_CS  (via drill 0.3)
  Top 0.15: v85.39,14.82 85.39,14.06 J1.12 | v75.14,22.44 74.86,22.71 74.86,23.34 74.58,23.34 D6.2 | R9.1 72.71,27.91 v71.88,27.91 71.67,27.91 68.56,31.02 68.42,31.02 68.35,31.09 68.35,31.37 68.28,31.44 67.59,31.44 TP10.TP 67.52,31.44 66.89,31.44 v64.26,34.07 | v28.67,52.56 28.67,52.35 24.72,48.41 21.26,48.41 20.36,47.51 20.36,46.74 U2.11
  Bottom 0.15: v85.39,14.82 77.77,22.44 v75.14,22.44 75.14,24.65 v71.88,27.91 | v28.67,52.56 29.71,52.56 30.82,51.45 30.82,51.04 35.94,45.91 43.7,45.91 55.75,33.86 64.06,33.86 v64.26,34.07
EPD_DC  (via drill 0.3)
  Top 0.15: v89.47,13.02 89.26,12.81 86.36,12.81 85.87,13.3 J1.11 | v95.7,8.38 95.91,8.17 95.91,7.13 96.26,7.13 TP11.TP | v14.54,44.25 14.4,44.25 12.74,45.91 12.74,46.67 U2.5
  Bottom 0.15: v95.7,8.38 95.7,9.21 91.89,13.02 v89.47,13.02 43.45,13.02 14.54,41.93 v14.54,44.25
EPD_RST  (via drill 0.3)
  Top 0.15: v86.36,14.82 86.36,14.06 J1.10 | v95.29,5.89 95.63,5.54 95.63,4.92 96.26,4.92 TP12.TP | v24.17,55.82 16.55,63.43 U2.21
  Bottom 0.15: v95.29,5.89 96.19,6.79 96.19,8.52 95.98,8.73 95.98,9.35 89.78,15.55 88.06,15.55 87.73,15.22 86.75,15.22 v86.36,14.82 86.28,14.82 84.76,13.3 71.74,13.3 67.8,17.24 67.8,17.52 68,17.73 68,19.94 43.14,44.8 35.39,44.8 24.38,55.82 v24.17,55.82
FLASH_CS  (via drill 0.3)
  Top 0.15: R5.1 31.51,44.46 31.86,44.46 31.86,44.67 32.2,45.01 32.2,45.15 32.34,45.29 32.34,45.5 32.55,45.7 33.1,45.7 33.17,45.77 33.17,45.98 D9.2 33.17,46.05 33.17,47.16 32.48,47.85 v32.48,50.69 | v32.48,56.85 32.48,57.27 32.55,57.34 32.55,57.55 32.2,57.55 U1.1 | v31.37,55.54 30.19,54.36 30.19,53.46 24.86,48.13 22.23,48.13 21.61,47.51 21.61,46.74 U2.12
  Bottom 0.15: v32.48,50.69 32.48,55.54 | 32.48,55.54 v32.48,56.85 | 32.48,55.54 v31.37,55.54
GDR
  Top 0.15: J1.2 90.37,13.3 89.61,12.53 72.09,12.53 72.09,12.74 R4.2 72.09,12.46 72.09,12.05 71.49,11.45 68.54,11.45 67.66,12.33 67.66,13.02 Q3.1
GND  (via drill 0.35)
  Top 0.15: U2.29_5 13.43,53.95 14.61,53.95 U2.29_8 | U4.1 132.12,31.13 133.12,30.13 | U4.9 132.88,30.23 | 132.88,30.23 132.99,30.13 133.12,30.13 | 133.12,30.13 U4.6 | U4.4 132.28,29.63 132.88,30.23 | BOOT_BUTTON.1 BOOT_BUTTON.2 27.22,107.8 C6.2
  other vias: 43.25,35.1 33.8,32.4 70.3,11.9 3,92.85 38.15,83 28.05,91.7 76.6,11.55 123.95,24.35 115.55,29.4 135,30 83.85,17.75 53.6,108.2 4.75,92.95 153.95,14.1 162.35,57.25 24.1,106.4 126.6,29.05 25.8,31.8 82.55,23.75 65.4,26.65 75.3,19.7 83.4,59.2 19.75,57.55 24.05,50.95 34.65,61.35 29.8,58.75 27.55,59.95 24.25,57.75
  pour Top: 94.56,10.09 94.58,10.07 94.58,0.68 94.88,0.38 169.57,0.38 169.87,0.68 169.87,66.17 169.37,66.67 92.28,66.67 92.26,66.69 91.84,67.11 91.82,67.13 91.82,110.12 91.22,110.72 69.18,110.72 68.04,109.59 68.02,109.57 19.98,109.57 19.96,109.59 18.67,110.87 1.13,110.87 0.33,110.07 0.33,65.88 0.68,65.53 5.77,65.53 5.79,65.51 6.51,64.79 6.53,64.77 6.53,45.58 6.51,45.56 6.09,45.14 6.07,45.12 0.33,45.12 0.33,44.53 0.41,44.44 0.43,44.42 0.43,0.73 0.68,0.48 75.22,0.48 75.47,0.73 75.47,9.92 75.49,9.94 75.96,10.41 75.98,10.43 94.22,10.43 94.24,10.41
  pour Bottom: 94.51,10.04 94.53,10.02 94.53,0.63 94.83,0.33 169.52,0.33 169.87,0.68 169.87,66.22 169.42,66.67 92.28,66.67 92.26,66.69 91.84,67.11 91.82,67.13 91.82,110.12 91.22,110.72 69.18,110.72 68.04,109.59 68.02,109.57 19.98,109.57 19.96,109.59 18.67,110.87 1.13,110.87 0.33,110.07 0.33,65.83 0.63,65.53 5.72,65.53 5.74,65.51 6.51,64.74 6.53,64.72 6.53,45.63 6.51,45.61 5.99,45.09 5.97,45.07 0.33,45.07 0.33,45.07 0.33,0.63 0.58,0.38 75.22,0.38 75.52,0.68 75.52,9.92 75.54,9.94 75.96,10.36 75.98,10.38 94.17,10.38 94.19,10.36
GPIO8  (via drill 0.3)
  Top 0.15: v21.19,42.38 22.02,42.38 R1.1 | v19.11,45.57 19.11,46.67 U2.10
  Bottom 0.15: v21.19,42.38 21.19,43.49 v19.11,45.57
I2C_PW  (via drill 0.3)
  Top 0.15: C2.1 154.98,8.93 156.02,8.93 C1.1 | C1.1 156.09,8.93 157.13,8.93 R1_PINH.1 157.2,8.93 R2_PINH.1 | C1.1 156.37,9 156.37,12.46 156.02,12.81 155.4,12.81 SENSOR2.6 155.33,12.81 154.22,12.81 148.68,18.35 142.24,18.35 v142.1,18.21 | U2.17 21.61,64.19 21.61,63.57 21.95,63.23 21.95,63.16 22.34,62.77 32.32,62.77 v33.35,61.74
  Bottom 0.15: v142.1,18.21 129.22,31.09 126.94,31.09 123.96,28.12 118.56,28.12 118.14,28.53 112.32,28.53 78.39,62.46 36.01,62.46 35.59,62.05 33.66,62.05 v33.35,61.74
INT_RTC  (via drill 0.3)
  Top 0.15: v26.04,56.99 16.55,47.51 16.55,46.74 U2.8 | v81.85,62.74 82.06,62.74 82.68,63.36 82.89,63.36 82.96,63.43 82.96,64.13 U3.3 82.96,64.19 82.96,65.23 82.89,65.3 82.89,67.03 R1_PINH1.1 82.89,67.1 82.89,67.31 82.34,67.31 82.13,67.52 82.13,79.43 88.5,85.8 88.5,86.49 89.12,86.49 TP15.TP
  Bottom 0.15: v26.04,56.99 31.37,62.33 35.46,62.33 35.87,62.74 v81.85,62.74
IO/BOOT
  Top 0.15: C6.1 27.63,108.65 26.94,108.65 26.32,109.28 25.76,109.28 BOOT_BUTTON.3 25.69,109.28 22.3,109.28 BOOT_BUTTON.4 22.23,109.28 21.33,109.28 20.71,108.65 20.01,108.65 R_BOOT.1 19.94,108.65 17.17,108.65 4.23,95.71 4.23,85.75 24.17,65.81 24.17,64.26 U2.15
IO/CHANGE  (via drill 0.3)
  Top 0.15: C10.1 66.06,109.14 65.93,109.28 65.79,109.28 CHANGE_BUTTON.3 65.72,109.28 62.26,109.28 CHANGE_BUTTON.4 62.19,109.28 61.98,109.28 61.84,109.14 60.87,109.14 R_CHANGE.1 60.8,109.14 v59.76,109.14 | v13.99,68.77 13.99,64.26 U2.23
  Bottom 0.15: v59.76,109.14 59.21,109.69 51.3,109.69 13.99,72.38 v13.99,68.77
MISO  (via drill 0.3)
  Top 0.15: v3.46,76.38 3.12,76.04 3.12,75.21 2.84,75.21 TP6.TP 2.77,75.21 2.35,75.21 2.35,75 8.93,68.42 8.93,64.26 U2.27 8.93,63.5 v9.35,63.09 | J4.P7 5.96,92.52 6.72,92.52 7.05,92.18 v7.05,91.62 | v24.99,34.46 24.87,34.34 24.87,33.04 | 24.87,33.04 24.87,31.29 26.32,29.85 26.94,29.85 R8.1 | 24.87,33.04 26.18,34.35 26.59,34.35 26.59,34.56 D12.2 | v21.47,63.09 21.47,62.88 28.12,56.23 32.13,56.23 U1.2
  Bottom 0.15: v3.46,76.38 3.46,82.27 6.3,85.11 6.3,90.65 7.05,91.4 v7.05,91.62 | v21.47,63.09 v9.35,63.09 9.28,63.09 6.03,59.83 6.03,51.87 6.44,51.45 7.96,51.45 24.98,34.44 v24.99,34.46
MOSI  (via drill 0.3)
  Top 0.15: 42.44,44.26 38.57,48.13 38.57,53.12 39.2,53.74 39.96,53.74 U1.5 | 42.44,44.26 73.61,13.09 84.21,13.09 84.35,13.23 84.35,13.99 J1.14 | v7.34,87.6 6.86,88.09 5.96,88.09 J4.P3 | v7.55,77.63 5.75,75.83 5.75,75.14 5.05,75.14 TP7.TP 5.68,75.07 5.68,74.51 v6.3,73.89 | R7.1 29.85,29.92 31.09,29.92 31.86,30.68 33.17,30.68 33.31,30.82 33.31,31.72 33.24,31.79 33.31,31.86 33.17,31.99 32.27,31.99 30.68,33.59 30.68,34.07 30.26,34.49 29.78,34.49 29.71,34.56 29.71,34.76 D11.2 29.71,34.9 29.58,34.96 v29.58,36.37 | v16.62,44.25 15.3,45.57 15.3,46.67 U2.7 15.3,46.74 15.3,47.37 14.82,47.85 13.99,47.85 12.74,49.1 v6.99,49.1 | 42.44,44.26 42.43,44.25 v38.78,44.25
  Bottom 0.15: v7.34,87.6 7.13,87.39 7.13,85.25 7.34,85.04 7.34,77.84 v7.55,77.63 | v16.62,44.25 16.62,44.04 25.55,35.11 28.32,35.11 v29.58,36.37 29.58,37.1 36.73,44.25 v38.78,44.25 | v6.3,73.89 6.51,73.68 6.51,67.17 4.92,65.58 4.92,51.31 6.23,50 6.23,49.86 v6.99,49.1
N$1  (via drill 0.3)
  Top 0.15: v155.95,47.85 155.95,47.09 R2-USB1.2 | v164.47,52.84 164.26,53.05 163.5,53.05 J2.A5
  Bottom 0.15: v155.95,47.85 159.07,47.85 164.05,52.84 v164.47,52.84
N$2
  Top 0.15: R2-USB.1 155.95,45.84 155.95,46.19 156.23,46.19 156.37,46.05 156.5,46.05 157.2,46.74 157.2,47.09 161.84,51.73 161.84,57.46 162.47,58.1 164.68,58.1 165.3,57.48 165.3,56.85 164.47,56.02 163.5,56.02 J2.B5
N$3
  Top 0.15: SENSOR2.8 155.4,14.4 156.37,14.4 157.2,13.57 158.24,13.57 SENSOR2.2
N$4
  Top 0.15: J1.18 82.34,14.06 82.34,18.49 83.52,19.67 83.52,20.22 83.72,20.22 EPD_C6.1
N$5  (via drill 0.3)
  Top 0.15: C1_BAT1.1 119.11,18.35 119.59,18.35 119.94,18.7 120.43,18.7 IC4.3 120.5,18.7 121.19,18.7 121.47,18.97 121.47,20.08 | 121.47,20.08 121.47,20.36 121.26,20.57 120.5,20.57 IC4.1 | Q1.2 129.91,26.11 129.91,25 129.71,24.79 129.71,20.98 129.77,20.91 129.77,20.5 129.5,20.5 D2.1 129.43,20.5 v128.39,20.5 | v121.53,20.08 121.47,20.08
  Bottom 0.15: v121.53,20.08 127.97,20.08 v128.39,20.5
N$6
  Top 0.15: J1.19 81.85,14.06 81.85,18.42 82.75,19.32 82.75,20.22 82.48,20.22 EPD_C7.1
N$7
  Top 0.15: J1.20 81.37,14.06 81.37,20.22 81.23,20.22 EPD_C8.1
N$8
  Top 0.15: C4.1 91.2,32.62 90.37,32.62 90.3,32.69 89.75,32.69 D3.2 89.68,32.69 89.33,32.69 89.33,31.37 87.05,29.09 86.36,29.09 D4.1
N$10
  Top 0.15: J1.22 80.33,14.06 80.33,18.07 78.74,19.67 78.74,20.22 78.6,20.22 EPD_C10.1
N$12
  Top 0.15: J1.24 79.36,14.06 79.36,14.82 77.08,17.11 74.24,17.11 73.82,16.69 72.5,16.69 71.81,17.38 71.53,17.38 EPD_C12.1
N$14
  Top 0.15: C_DELAY.1 50.83,101.31 50.34,101.31 49.86,101.8 49.51,101.8 IC1.5
N$16  (via drill 0.3)
  Top 0.15: v117.38,29.29 117.45,29.36 117.45,29.5 117.24,29.71 116.83,29.71 116.75,29.78 116.75,29.98 R1_BAT.2 | v123.96,29.15 123.89,29.09 123.89,29.02 124.03,28.88 124.03,28.25 124.1,28.18 125,28.18 MCP73831.1
  Bottom 0.15: v117.38,29.29 117.59,29.09 118.42,29.09 118.83,28.67 123.47,28.67 v123.96,29.15
N$17
  Top 0.15: CHG_LED.C 119.46,29.98 118.14,29.98 118.07,29.92 118,29.98 R1_BAT.1
N$18
  Top 0.15: R2_BAT.2 121.67,26.38 122.02,26.38 122.02,26.66 121.95,26.73 121.95,27.7 122.02,27.77 122.02,28.18 122.36,28.18 MCP73831.5
N$21  (via drill 0.3)
  Top 0.15: v88.5,65.58 88.5,56.58 88.43,56.51 88.43,56.23 88.78,56.23 R_CAPACITOR.1 | v88.78,66.69 88.57,66.89 88.02,66.89 D7.1
  Bottom 0.15: v88.5,65.58 88.5,66.41 v88.78,66.69
N$22
  Top 0.15: J1.4 89.33,14.06 89.33,19.46 89.61,19.74 89.61,20.22 89.82,20.22 EPD_C1.1
N$23
  Top 0.15: J1.5 88.85,14.06 88.85,20.22 88.71,20.22 EPD_C2.1
PREVGH  (via drill 0.3)
  Top 0.15: J1.21 80.88,14.06 80.88,17.94 79.57,19.25 79.57,20.22 79.78,20.22 EPD_C9.1 79.57,20.29 79.57,20.71 79.36,20.91 79.29,20.91 79.22,20.98 79.15,20.98 79.08,20.91 77.97,20.91 77.01,21.88 v77.01,22.92 | v77.01,27.91 76.87,28.05 76.87,35.18 78.81,37.12 79.5,37.12 D5.1
  Bottom 0.15: v77.01,22.92 v77.01,27.91
PREVGL  (via drill 0.3)
  Top 0.15: 79.84,14.75 79.84,14.06 J1.23 | 79.84,14.75 77.21,17.38 73.13,17.38 EPD_C11.1 | v84.42,14.96 84.42,15.17 85.8,16.55 85.8,19.8 86.42,20.43 86.42,20.77 89.4,23.75 89.4,28.67 89.33,28.74 89.33,29.09 89.75,29.09 D4.2 | v79.84,14.82 79.84,14.75
  Bottom 0.15: v84.42,14.96 79.98,14.96 v79.84,14.82
RESE
  Top 0.15: J1.3 89.89,14.06 89.89,14.68 89.96,14.75 91.13,14.75 91.41,14.47 91.41,13.5 90.16,12.26 80.4,12.26 78.74,10.6 73.68,10.6 71.26,8.17 70.15,8.17 R3.2 70.08,8.17 69.87,8.17 69.87,9.07 67.03,11.91 67.03,13.71 67.24,13.92 68.77,13.92 68.97,13.71 68.97,13.09 Q3.2
RESE'
  Top 0.15: R3.1 70.08,6.86 68.28,6.86 68.28,7.48 SJ1.2 68.28,7.55 68.28,8.31 68.21,8.38 68.21,9.21 R2.2
RESET  (via drill 0.3)
  Top 0.15: C5.1 51.11,109.07 50.9,109.28 50.76,109.28 RESET_BUTTON.3 50.69,109.28 47.3,109.28 RESET_BUTTON.4 47.23,109.28 46.54,109.28 46.47,109.21 45.91,109.21 R_RESET.1 45.84,109.21 v45.08,109.21 | IC1.1 46.6,101.8 46.33,101.8 46.33,102.08 46.4,102.14 v46.4,105.4 | v9.14,48.61 9.21,48.61 10.18,47.64 10.18,46.74 U2.3
  Bottom 0.15: 46.4,106.16 46.4,107.89 v45.08,109.21 | v9.14,48.61 8.93,48.61 6.37,51.18 6.3,51.18 5.75,51.73 5.75,65.16 46.4,105.81 46.4,106.16 | v46.4,105.4 46.4,106.16
RTC_RST  (via drill 0.3)
  Top 0.15: v81.02,65.3 81.37,64.96 81.58,64.96 81.65,64.89 81.65,64.19 U3.4 | U2.16 22.92,64.19 22.92,63.16 22.99,63.09 31.79,63.09 v31.89,63.2
  Bottom 0.15: v81.02,65.3 79.01,63.29 35.59,63.29 35.18,62.88 32.41,62.88 32.09,63.2 v31.89,63.2
RX
  Top 0.15: U2.24 12.74,64.26 12.74,68.07 13.5,68.83 13.5,70.01 TP2.TP
SCK  (via drill 0.3)
  Top 0.15: J1.13 84.83,13.99 84.83,13.3 84.35,12.81 73.47,12.81 58.66,27.63 32.69,27.63 TP8.TP 32.62,27.56 32.55,27.63 32.62,27.7 32.62,29.29 32.96,29.64 32.96,29.98 32.62,29.98 R6.1 33.03,29.98 33.24,29.98 34.59,31.33 34.59,33.07 33.24,34.42 32.62,34.42 32.62,34.69 D10.2 | U1.6 39.96,54.98 39.33,54.98 38.3,53.95 38.3,41.55 32.62,35.87 32.62,34.76 D10.2 | v16,44.25 15.65,44.25 13.99,45.91 13.99,46.67 U2.6 13.99,46.74 13.99,47.44 12.6,48.82 11.36,48.82 v10.66,48.13 | v31.79,34.83 32.55,34.83 D10.2 | J4.P5 5.96,90.3 6.98,90.3 v7.05,90.37
  Bottom 0.15: v16,44.25 25.41,34.83 v31.79,34.83 | v10.66,48.13 9,48.13 6.37,50.76 6.3,50.76 5.47,51.59 5.47,65.3 7.06,66.89 7.06,84.9 6.86,85.11 6.86,90.16 v7.05,90.36 v7.05,90.37
SCL  (via drill 0.3)
  Top 0.15: v134.48,30.95 134.48,30.68 134.41,30.61 133.79,30.61 U4.7 | v157.2,11.98 158.24,11.98 SENSOR2.4 158.31,11.98 158.62,11.98 159.14,11.46 159.14,7.99 158.77,7.62 158.38,7.62 R2_PINH.2 | v163.01,19.32 164.47,20.77 165.23,20.77 J3.4 | v18.63,62.6 17.8,63.43 17.8,64.19 U2.20 | v85.25,56.23 85.45,56.02 85.45,54.91 U3.16
  Bottom 0.15: v163.01,19.32 163.01,15.95 159.05,11.98 v157.2,11.98 157.1,11.98 138.12,30.95 v134.48,30.95 129.77,30.95 129.36,31.37 126.8,31.37 123.82,28.39 118.69,28.39 118.28,28.81 112.46,28.81 85.18,56.09 85.25,56.16 v85.25,56.23 85.25,59.97 81.99,63.23 81.72,63.23 81.51,63.02 35.73,63.02 35.32,62.6 21.33,62.6 21.12,62.81 18.84,62.81 v18.63,62.6
SDA  (via drill 0.3)
  Top 0.15: v134.97,31.44 134.34,31.44 134.07,31.16 133.79,31.16 U4.8 133.72,31.16 133.58,31.16 133.58,31.44 133.24,31.79 130.95,31.79 129.77,30.61 v128.39,30.61 | 159.01,12.46 158.67,12.81 158.31,12.81 SENSOR2.3 158.24,12.81 157.2,12.81 v157.06,12.95 | 159.01,12.46 159.41,12.06 159.41,7.41 158.93,6.92 157.79,6.92 157.47,7.24 157.47,7.62 157.2,7.62 R1_PINH.2 | 159.01,12.46 161.56,12.46 166.41,17.31 166.41,19.46 166.06,19.8 165.3,19.8 J3.3 | v19.11,62.12 19.11,64.19 U2.19 | v83.58,56.02 83.93,55.68 84.14,55.68 84.21,55.61 84.21,54.91 U3.15
  Bottom 0.15: v134.97,31.44 135.18,31.23 138.36,31.23 156.64,12.95 v157.06,12.95 | v19.11,62.12 19.11,61.91 25,56.02 30.4,56.02 36.29,61.91 78.11,61.91 79.98,60.04 79.98,59.62 v83.58,56.02 84.42,56.02 112.19,28.25 118,28.25 118.42,27.84 124.1,27.84 127.07,30.82 128.18,30.82 v128.39,30.61
SRC  (via drill 0.3)
  Top 0.15: C4.2 91.2,33.93 87.39,33.93 84.21,37.12 83.1,37.12 D5.2 82.96,37.12 81.85,37.12 79.43,34.69 79.43,32.76 L1.1 78.94,32.76 v77.91,32.76 | v68.28,17.38 68.28,15.17 Q3.3
  Bottom 0.15: v68.28,17.38 68.28,24.93 76.11,32.76 v77.91,32.76
SS_SD  (via drill 0.3)
  Top 0.15: 10.11,97.64 R10.1 11.64,97.67 D8.2 12.12,97.16 11.43,97.16 8.17,93.9 8.17,92.38 v8.31,92.24 | v11.15,45.57 11.49,45.91 11.49,46.67 U2.4 | v6.58,84.76 7.06,85.25 7.06,86.56 6.92,86.7 6.92,86.98 6.37,86.98 J4.P2
  Bottom 0.15: v11.15,45.57 6.23,50.48 6.16,50.48 5.19,51.45 5.19,65.44 6.79,67.03 6.79,84.55 v6.58,84.76 6.58,90.51 v8.31,92.24
TX
  Top 0.15: U2.25 11.49,64.26 11.49,68.7 11.29,68.9 11.29,70.08 TP1.TP
USB_D+  (via drill 0.3)
  Top 0.15: v153.11,50.69 154.15,50.69 D1.4 | v120.63,31.44 119.66,32.41 116.75,32.41 114.33,29.98 92.03,29.98 v91.83,30.19 | v30.05,51.18 28.74,51.18 24.79,47.23 24.17,47.23 24.17,46.74 U2.14
  Bottom 0.15: v153.11,50.69 133.65,31.23 129.91,31.23 129.5,31.65 120.84,31.65 v120.63,31.44 | v91.83,30.19 90.16,28.53 83.17,28.53 78.18,33.52 77.63,33.52 77.42,33.31 55.47,33.31 43.42,45.36 35.66,45.36 30.05,50.97 v30.05,51.18
USB_D-  (via drill 0.3)
  Top 0.15: v152.07,50.28 152.35,50.28 152.9,49.72 152.9,49.24 153.39,48.75 154.15,48.75 D1.6 | v119.53,31.92 118.97,31.37 116.13,31.37 114.47,29.71 v90.72,29.71 | v29.57,51.66 29.36,51.45 28.6,51.45 25,47.85 23.34,47.85 22.92,47.44 22.92,46.74 U2.13
  Bottom 0.15: v152.07,50.28 152.07,50.07 133.51,31.51 130.05,31.51 129.64,31.92 v119.53,31.92 | v90.72,29.71 89.82,28.81 83.31,28.81 78.32,33.79 77.49,33.79 77.28,33.59 55.61,33.59 43.56,45.64 35.8,45.64 30.54,50.9 30.54,51.31 30.19,51.66 v29.57,51.66
VBAT
  Top 0.3: 131.85,30.61 131.78,30.54 131.78,30.19 U4.3 | 131.85,30.61 131.78,30.68 U4.2 131.64,30.61 | 128.22,29.57 127.39,30.4 126.87,30.4 C2_BAT.1 126.73,30.4 126.1,30.4 125.83,30.12 125.07,30.12 MCP73831.3 124.86,30.12 124.65,30.12 124.65,35.39 122.5,37.53 122.5,38.23 121.95,38.23 TP3.TP | 128.22,29.57 128.94,28.84 128.94,28.32 Q1.3 | 128.22,29.57 129.77,29.57 130.81,30.61 131.85,30.61
VBUS
  Top 0.3: C5-USB.1 158.58,52.08 158.58,50.69 157.61,49.72 156.71,49.72 D1.2 156.5,49.72 155.74,49.72 155.33,49.31 155.33,48.48 154.91,48.06 153.25,48.06 | C4-USB.1 151.73,48.13 151.8,48.06 153.25,48.06 | 126.25,27.49 124.23,27.49 123.61,28.12 123.61,28.74 122.71,29.64 122.71,30.12 122.5,30.12 MCP73831.4 122.36,30.12 121.47,30.12 121.33,29.98 121.05,29.98 CHG_LED.A 120.91,29.98 120.77,29.98 120.77,30.19 120.01,30.95 116.27,30.95 113.31,27.99 113.31,24.09 114.85,22.55 116.88,22.55 118.1,21.33 | 126.25,27.49 127.4,27.49 127.41,27.48 134.38,27.48 137.52,30.63 137.52,33.23 145.98,41.69 145.98,42.38 146.39,42.38 TP14.TP 146.6,42.38 152.63,42.38 152.63,42.45 PFMF.050.1.2 152.63,42.66 152.63,47.44 153.25,48.06 | Q1.1 127.98,25.78 127.6,25.4 127.1,25.4 126.9,25.6 126.9,26.84 126.25,27.49 | R1-PWRUSB.2 115.72,19.25 115.72,20.43 C1_BAT.1 115.79,20.57 116.55,21.33 118.1,21.33 | 118.1,21.33 121.05,21.33 122.5,19.88 123.68,19.88 124.23,19.32 127.56,19.32 128.46,18.42 129.43,18.42 D2.2
VRTC
  Top 0.3: C10_SUPERCAP.1 91.69,54.91 88.85,54.91 R_CAPACITOR.2 88.64,54.91 87.67,54.91 85.73,52.98 83.17,52.98 C8.1 83.03,52.84 83.03,53.81 82.96,53.88 82.96,54.85 U3.14
VUSB
  Top 0.3: J2.A4 163.5,51.8 163.5,52.01 J2.B9 163.36,52.08 162.84,52.08 162.25,52.66 | J2.A9 163.5,56.78 163.5,56.58 J2.B4 163.36,56.58 163.01,56.58 162.94,56.65 162.67,56.65 162.25,56.23 162.25,52.66 | PFMF.050.1.1 157.13,42.66 157.13,43.77 157.61,44.25 157.61,46.95 162.25,51.59 162.25,52.66